# EAGLE board ospi_v11 (EAGLE 6.4)
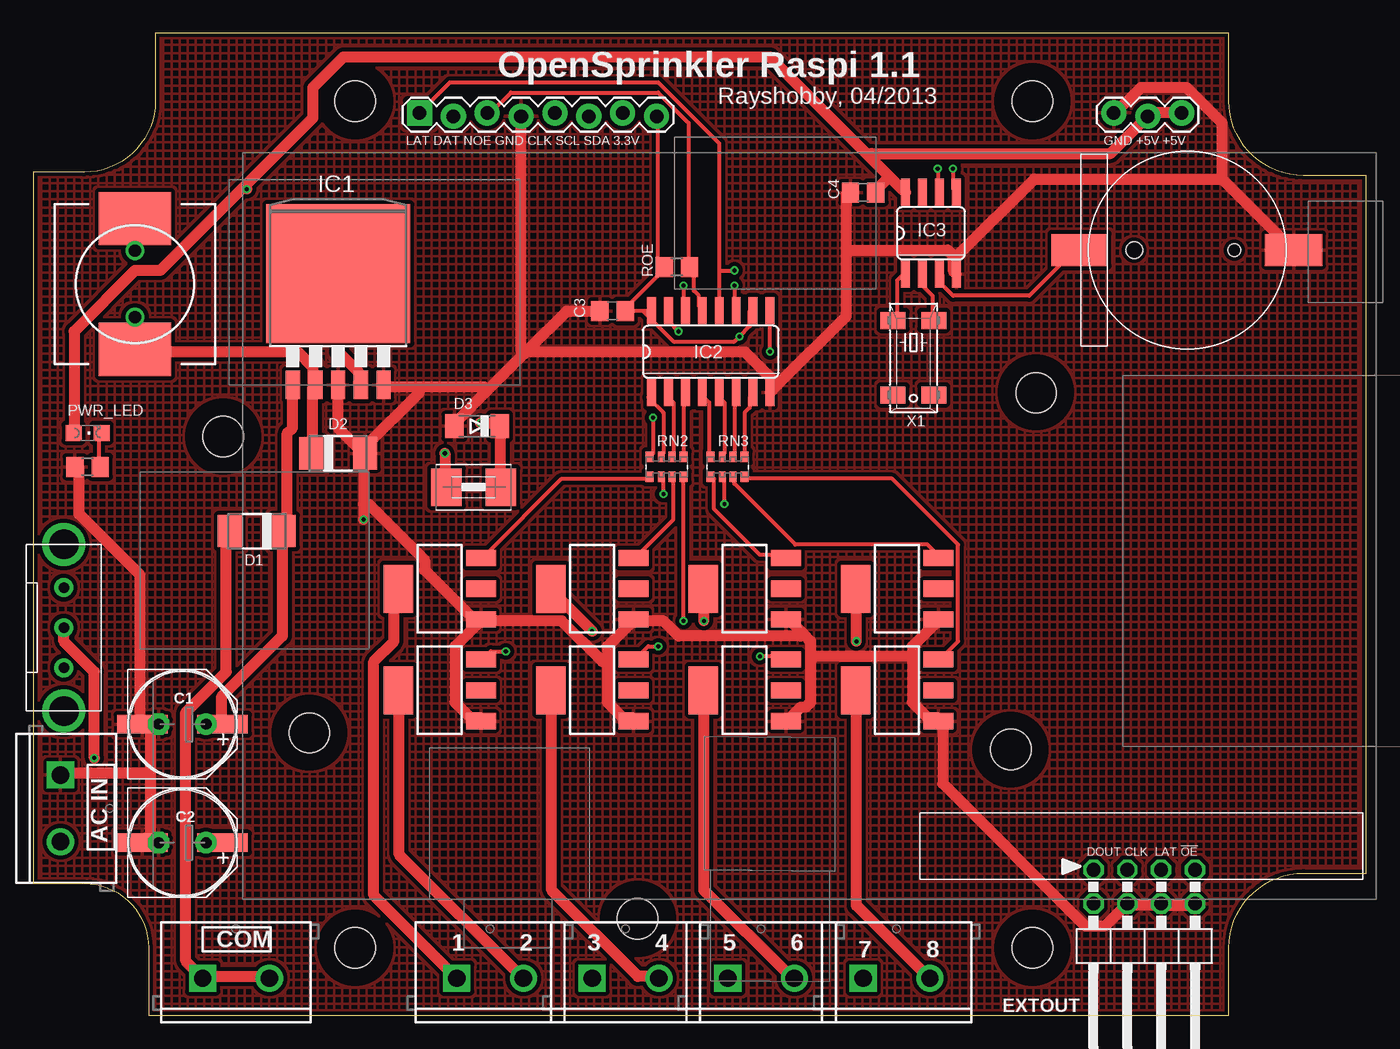
[diagram p0: board, top side]
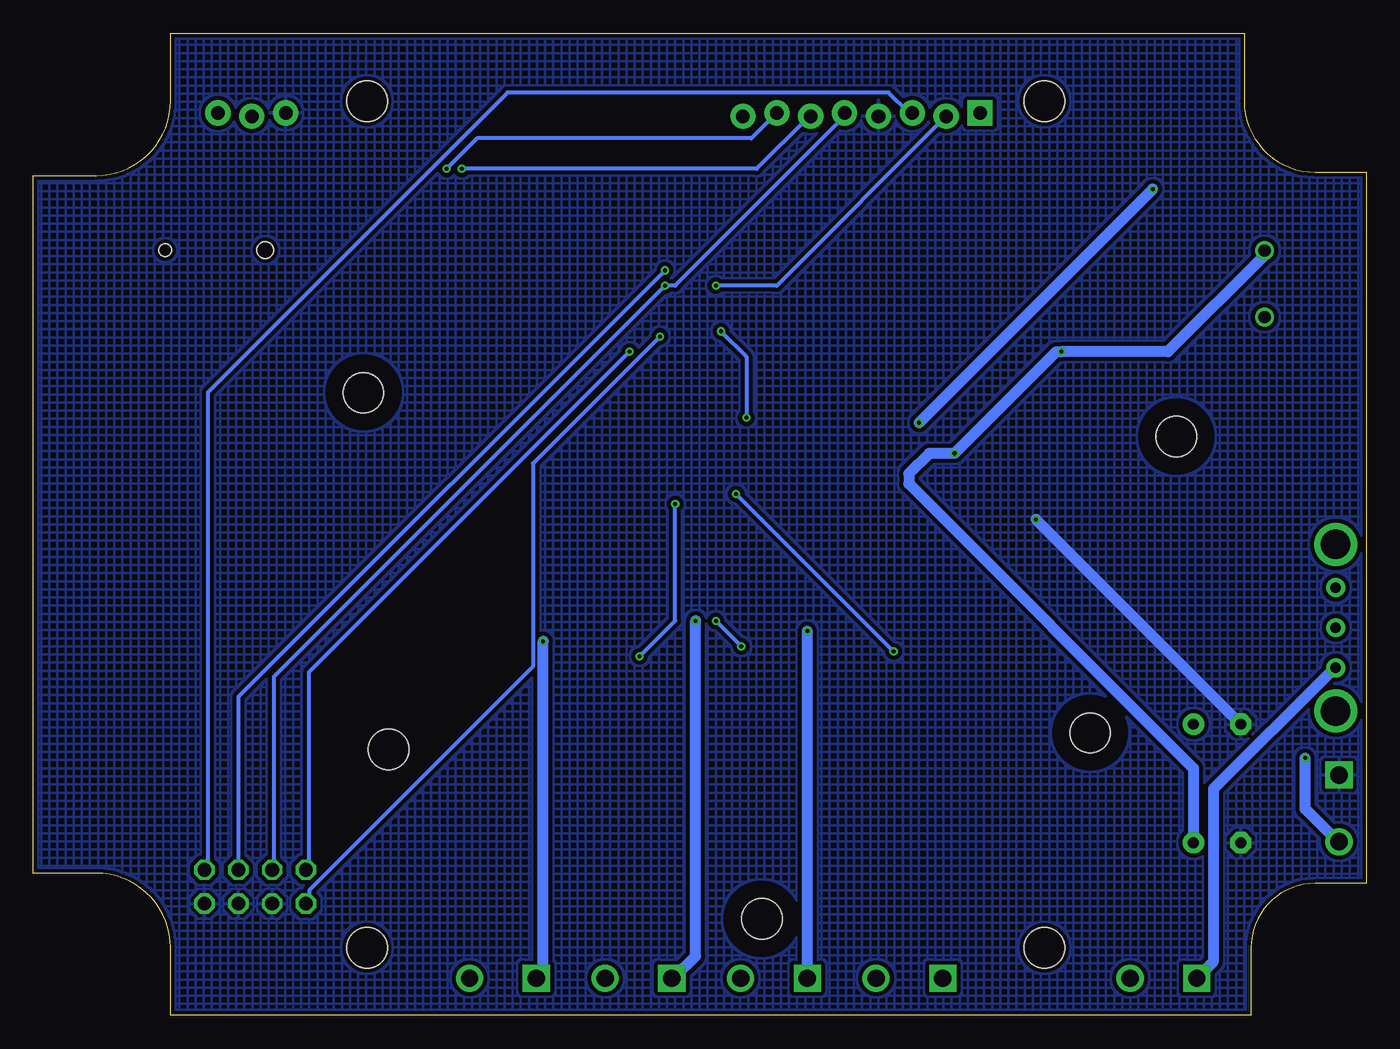
[diagram p1: board, bottom side, seen from below]

Size 99.95 x 73.66 mm. Coordinates in mm from the lower left corner, seen from the top.
Outline: 8.64,0 89.66,0 89.66,5.08 arc-90 95.25,10.67 99.95,10.67 99.95,62.99 95.25,62.99 arc-90 89.66,68.58 89.66,73.66 9.14,73.66 9.14,68.58 arc-90 3.81,63.25 0,63.25 0,9.91 3.81,9.91 arc-90 8.64,5.08 8.64,0
Copper layers (1*16): Top 0.035mm / dielectric 1.5mm / Bottom 0.035mm
Design rules "Fusion_eagle_rule_v1.1": minimum track width 6mil, minimum drill 12mil, track to track 6mil, track to pad 6mil, pad to pad 6mil, via to via 6mil, smd to smd 0mil, copper to edge 10mil, drill to drill 10mil, minimum pad ring 10mil, minimum via ring 6mil, stop-mask expansion 2mil, vias tented up to drill 100mil, thermal gap 10mil
Net classes: 0 default: width 0.305 mm, clearance 0.203 mm; 1 power: width 0.813 mm, clearance 0.203 mm
Holes 3.05 mm at 24.13,5.08 74.93,5.08 24.13,68.58 74.93,68.58
tRestrict: area 21.6,2.5 to 26.7,7.6; area 72.4,2.5 to 77.5,7.6; area 21.6,66 to 26.7,71.1; area 72.4,66 to 77.5,71.1; area 18.2,18.7 to 23.2,23.7; area 42.8,4.7 to 47.9,9.8; area 70.7,17.4 to 75.8,22.5; area 72.6,44.2 to 77.7,49.3; area 11.7,40.9 to 16.8,46
bRestrict: area 11.7,40.9 to 16.8,46; area 72.6,44.2 to 77.7,49.3; area 70.7,17.4 to 75.8,22.5; area 42.8,4.7 to 47.9,9.8; area 18.2,18.7 to 23.2,23.7
vRestrict: area 4.1,12.7 to 6.1,18.5; area 12.7,4.8 to 17.8,6.6; area 72.6,0.3 to 78.2,1.3

## Footprints (pad centres in the part's own frame; a part is rotated, then mirrored left to right if it is on the bottom)
BATTCON_12MM_SMT = smd 2.4 x 4.3: P$1 0,11.96 | smd 2.4 x 4.2: P$2 0,-4.1 | hole 0.95: 0,7.5 | hole 1.25: 0,0
E3,5-8 = drill 0.813 pad 1.6: + -1.778,0 | drill 0.813 pad 1.6 octagon: - 1.778,0
PANASONIC_E = smd 3.8 x 1.4: + 3,0; - -3,0
C0805 = smd 1.3 x 1.5: 1 -0.95,0; 2 0.95,0
SCREWTERMINAL-5MM-2 = drill 1.3 pad 2.032 square: 1 0,0 | drill 1.3 pad 2.032: 2 5,0
DO-214AC = smd 1.8 x 2.4: A 2.025,0; C -2.025,0
MINIMELF = smd 1.4 x 1.8: A 1.7,0; C -1.7,0
2X04/90 = drill 1.016 octagon: 1 -3.81,-6.35; 2 -3.81,-3.81; 3 -1.27,-6.35; 4 -1.27,-3.81; 5 1.27,-6.35; 6 1.27,-3.81; 7 3.81,-6.35; 8 3.81,-3.81
1812 = smd 2.286 x 2.794: 1 -2.046,0; 2 2.046,0
TO263-5 = smd 1.067 x 2.159: 1 -3.404,-5.791; 2 -1.702,-5.791; 3 0,-5.791; 4 1.702,-5.791; 5 3.404,-5.791 | smd 10.8 x 10.41: 6 0,2.54
SO16 = smd 0.66 x 2.032: 1 -4.445,-3.073; 2 -3.175,-3.073; 3 -1.905,-3.073; 4 -0.635,-3.073; 5 0.635,-3.073; 6 1.905,-3.073; 7 3.175,-3.073; 8 4.445,-3.073; 9 4.445,3.073; 10 3.175,3.073; 11 1.905,3.073; 12 0.635,3.073; 13 -0.635,3.073; 14 -1.905,3.073; 15 -3.175,3.073; 16 -4.445,3.073
SO08 = smd 0.66 x 2.032: 1 -1.905,-3.073; 2 -0.635,-3.073; 3 0.635,-3.073; 4 1.905,-3.073; 5 1.905,3.073; 6 0.635,3.073; 7 -0.635,3.073; 8 -1.905,3.073
EG1206 = drill 0.8 pad 1.422: 1 -3,0; 2 0,0; 3 3,0 | drill 2.2: MT1 -6.25,0; MT2 6.25,0
1X08_LOCK = drill 1.016 pad 1.88 square: 1 0,0.127 | drill 1.016 pad 1.88: 2 2.54,-0.127; 3 5.08,0.127; 4 7.62,-0.127; 5 10.16,0.127; 6 12.7,-0.127; 7 15.24,0.127; 8 17.78,-0.127
1X03_LOCK = drill 1.016 pad 1.88: 1 0,0.127; 2 2.54,-0.127; 3 5.08,0.127
CDRH125 = smd 5.4 x 4: 1 0,4.9; 2 0,-4.9
6000-XXXX-RC = drill 0.9 pad 1.422: 1 -2.5,0; 2 2.5,0
CHIPLED_0805 = smd 1.2 x 1.2: A 0,-1.05; C 0,1.05
R0805 = smd 1.3 x 1.5: 1 -0.95,0; 2 0.95,0
EXB38V = smd 0.6 x 0.8: 1 -1.275,-0.75; 4 1.275,-0.75; 5 1.275,0.75; 8 -1.275,0.75 | smd 0.5 x 0.8: 2 -0.4,-0.75; 3 0.4,-0.75; 6 0.4,0.75; 7 -0.4,0.75
SOT223 = smd 1.219 x 2.235: 1 -2.311,-3.099; 2 0,-3.099; 3 2.311,-3.099 | smd 3.6 x 2.2: 4 0,3.099
OSPI = hole 3.048: 25,-6; 53,6.735; 84.06,-29.465 | hole 3: 77.6,-7.225; 23.1,-32.725
MM20SS = smd 1.27 x 1.88: 1 -2.794,-1.524; 2 2.794,-1.524; 3 2.794,1.524; 4 -2.794,1.524

## Placement (x,y rotation side)
BAT1  [BATTCON_12MM_SMT]  82.55,57.4 270 top
C1  100u/50V  [E3,5-8]  11.18,21.84 180 top
C1'  100u  [PANASONIC_E]  11.18,21.84 0 top
C2  100u  [E3,5-8]  11.18,12.95 180 top
C2'  100u  [PANASONIC_E]  11.18,12.95 0 top
C3  0.1u  [C0805]  43.43,52.83 180 top
C4  0.1u  [C0805]  62.23,61.72 180 top
COM  [SCREWTERMINAL-5MM-2]  12.7,2.79 0 top
D1  S1B  [DO-214AC]  16.76,36.32 180 top
D2  SS14  [DO-214AC]  22.86,42.16 0 top
D3  5.6V  [MINIMELF]  33.27,44.2 180 top
EXTOUT1  [2X04/90]  83.31,4.57 180 top
F2  [1812]  33.02,39.62 0 top
IC1  LM2596S  [TO263-5]  22.86,53.09 0 top
IC2  74HC595N  [SO16]  50.8,49.78 0 top
IC3  DS1307  [SO08]  67.31,58.67 0 top
J0  24VAC IN  [SCREWTERMINAL-5MM-2]  2.03,18.03 270 top
J2  EG1206  [EG1206]  2.29,29.08 270 top
JP1  [1X08_LOCK]  28.96,67.56 0 top
JP2  [1X03_LOCK]  81.03,67.56 0 top
L1  150uH  [CDRH125]  7.62,54.86 180 top
L1'  100uH  [6000-XXXX-RC]  7.62,54.86 90 top
PWR_LED  [CHIPLED_0805]  4.06,43.69 270 top
RLED  1K  [R0805]  4.06,41.15 180 top
RN2  [EXB38V]  47.5,41.15 0 top
RN3  [EXB38V]  52.07,41.15 0 top
ROE  10K  [R0805]  48.26,56.13 180 top
S12  [SCREWTERMINAL-5MM-2]  31.75,2.79 0 top
S34  [SCREWTERMINAL-5MM-2]  41.91,2.79 0 top
S56  [SCREWTERMINAL-5MM-2]  52.07,2.79 0 top
S78  [SCREWTERMINAL-5MM-2]  62.23,2.79 0 top
T1  BT1308W  [SOT223]  30.48,32 90 top
T2  BT1308W  [SOT223]  30.48,24.38 90 top
T3  BT1308W  [SOT223]  41.91,32 90 top
T4  BT1308W  [SOT223]  41.91,24.38 90 top
T5  BT1308W  [SOT223]  53.34,32 90 top
T6  BT1308W  [SOT223]  53.34,24.38 90 top
T7  BT1308W  [SOT223]  64.77,32 90 top
T8  BT1308W  [SOT223]  64.77,24.38 90 top
U$2  OSPI  [OSPI]  98.3,13.97 180 top
X1  32.657k  [MM20SS]  66,49.33 270 top

## Library data of the parts
BAT1 JP1 L1 = SparkFunNew
C1 C1' C2 C2' = resistor
C3 C4 L1' RLED ROE = rcl
COM IC2 J0 JP2 S12 S34 S56 S78 T1-T8 = SparkFun
D1-D3 = diode
EXTOUT1 = pinhead
F2 IC3 J2 PWR_LED = adafruit
IC1 = national-semiconductor; MF: NATIONAL SEMICONDUCTOR; MPN: LM2596S-ADJ/NOPB; OC_FARNELL: 9494367; OC_NEWARK: 41K3842
RN2 RN3 = resistor-dil; OC_FARNELL: unknown; OC_NEWARK: unknown
U$2 = RaspberryPi
X1 = crystal; OC_FARNELL: unknown; OC_NEWARK: unknown

## Nets
24VAC [power]: COM.1 COM.2 D1.A J2.3
A1: EXTOUT1.1 IC2.13 JP1.3 ROE.1
D5: IC2.14 JP1.2
D6: EXTOUT1.5 IC2.11 JP1.5
D7: EXTOUT1.3 IC2.12 JP1.1
GND [power]: BAT1.P$1 C1'.- C1.- C2'.- C2.- C3.2 C4.2 D2.A D3.A EXTOUT1.2 EXTOUT1.4 EXTOUT1.6 IC1.3 IC1.5 IC2.8 IC3.4 J0.1 JP1.4 JP2.1 RLED.2 T1.1 T2.1 T3.1 T4.1 T5.1 T6.1 T7.1 T8.1
N$1: PWR_LED.C RLED.1
N$2 [power]: C1'.+ C1.+ D1.C IC1.1
N$3: RN2.1 T1.3
N$4: IC2.5 RN3.7
N$5: IC2.6 RN3.6
N$6 [power]: J0.2 J2.2
N$7: IC2.7 RN3.5
N$8 [power]: D2.C IC1.2 L1'.1 L1.1
N$9: IC3.1 X1.1
N$10: IC2.4 RN3.8
N$11: IC2.3 RN2.5
N$12: IC2.2 RN2.6
N$13: IC2.1 RN2.7
N$14: IC2.15 RN2.8
N$15: RN2.2 T2.3
N$16 [power]: S12.1 T1.4
N$17 [power]: S12.2 T2.4
N$18 [power]: S34.1 T3.4
N$19: RN2.3 T3.3
N$20 [power]: S34.2 T4.4
N$21: RN2.4 T4.3
N$22 [power]: S56.1 T5.4
N$23 [power]: S56.2 T6.4
N$24 [power]: S78.1 T7.4
N$25 [power]: S78.2 T8.4
N$26: RN3.1 T5.3
N$27: RN3.2 T6.3
N$28: RN3.3 T7.3
N$29: RN3.4 T8.3
N$30: IC3.2 X1.4
N$36: BAT1.P$2 IC3.3
QH*: EXTOUT1.7 IC2.9
SCL: IC3.6 JP1.6
SDA: IC3.5 JP1.7
VCC: C3.1 EXTOUT1.8 IC2.10 IC2.16 JP1.8 ROE.2
VIN [power]: C4.1 D3.C F2.2 IC3.8 JP2.2 JP2.3 PWR_LED.A
VIN_PRE [power]: C2'.+ C2.+ F2.1 IC1.4 L1'.2 L1.2

## Tracks (layer width: path | path; a pad name or v marks a point on that pad's centre or on a via)
24VAC
  Top 0.813: D1.A 14.48,36.07 14.48,25.78 11.43,22.73 11.43,4.06 COM.1 12.95,2.92 17.53,2.92 COM.2
  Bottom 0.813: COM.1 11.43,4.06 11.43,17.02 2.67,25.78 2.29,25.78 J2.3
A1
  Top 0.305: IC2.13 49.91,53.21 49.91,53.97 49.53,54.36 49.53,55.88 ROE.1 49.15,56.26 49.15,66.93 46.86,69.22 35.81,69.22 34.29,67.69 JP1.3
  Bottom 0.305: EXTOUT1.1 86.87,10.92 86.87,46.74 64.39,69.22 35.81,69.22 34.29,67.69 JP1.3
D5  (via drill 0.3)
  Top 0.305: v48.77,54.74 48.77,53.21 IC2.14
  Bottom 0.305: v48.77,54.74 44.2,54.74 JP1.2
D6  (via drill 0.3)
  Top 0.305: v52.58,54.74 52.58,53.21 IC2.11
  Bottom 0.305: JP1.5 38.86,67.69 51.82,54.74 v52.58,54.74 81.92,25.4 81.92,10.92 EXTOUT1.5
D7  (via drill 0.3)
  Top 0.305: 51.44,55.88 51.44,65.41 46.86,69.98 31.24,69.98 JP1.1 | 51.44,55.88 IC2.12 | 51.44,55.88 v52.58,55.88
  Bottom 0.305: EXTOUT1.3 84.58,23.88 v52.58,55.88
GND  (via drill 0.3)
  Top 0.813: T2.1 33.53,22.35 32.77,22.35 31.62,23.5 31.62,27.69 33.53,29.59 T1.1 | 43.05,26.54 43.05,27.69 44.96,29.59 T3.1 45.34,29.59 47.24,29.59 48.39,28.45 57.53,28.45 57.72,28.64 | 43.05,26.54 43.05,23.5 44.2,22.35 44.96,22.35 T4.1 | T1.1 33.91,29.59 39.62,29.59 42.67,26.54 43.05,26.54 | 58.29,26.92 58.29,28.07 57.72,28.64 | 58.29,26.92 58.29,23.5 57.91,23.11 57.53,23.11 56.77,22.35 T6.1 | 57.72,28.64 56.77,29.59 T5.1 | EXTOUT1.2 86.87,8.25 84.96,8.25 EXTOUT1.4 84.58,8.25 82.3,8.25 EXTOUT1.6 80.39,6.73 78.87,6.73 68.2,17.4 68.2,21.97 T8.1 67.82,22.35 67.06,22.35 65.91,23.5 65.91,26.92 | 65.91,26.92 65.91,27.69 67.82,29.59 T7.1 | 65.91,26.92 58.29,26.92 | C2.- 9.14,13.21 8.38,13.21 C2'.- 8.76,13.59 8.76,18.16 | RLED.2 3.43,41.02 3.43,37.59 8,33.02 8,21.97 C1'.- 8.38,21.97 9.14,21.97 C1.- 8.76,21.59 8.76,18.16 | 8.76,18.16 2.29,18.16 J0.1 | 89.15,62.74 89.15,66.93 86.49,69.6 83.06,69.6 81.15,67.69 JP2.1 | 89.15,62.74 94.49,57.4 BAT1.P$1 | 60.96,57.4 60.96,52.45 55.82,47.31 | 60.96,57.4 60.96,61.59 C4.2 | 55.82,47.31 55.24,46.74 IC2.8 | 68.96,57.02 68.96,55.88 IC3.4 | 68.96,57.02 68.58,57.4 60.96,57.4 | IC1.3 22.86,44.07 24.77,42.16 D2.A | C3.2 40.01,52.83 37.15,49.97 | 34.1,46.93 31.62,44.45 D3.A | 34.1,46.93 36.77,49.59 | 36.77,49.59 37.15,49.97 | 28.96,47.12 33.91,47.12 34.1,46.93 | 28.96,47.12 26.29,47.12 IC1.5 | JP1.4 36.58,49.78 36.77,49.59 | D2.A 24.77,42.54 28.96,46.74 28.96,47.12 | 55.82,47.31 53.34,49.78 37.34,49.78 37.15,49.97 | 89.15,62.74 75.06,62.74 69.34,57.02 68.96,57.02 | 24.77,38.35 24.77,41.78 D2.A | 24.77,38.35 v24.77,37.21 | T1.1 33.15,29.59 29.34,33.4 29.34,34.16 25.15,38.35 24.77,38.35
  Bottom 0.813: v24.77,37.21 C1.-
  pour Top (isolate 0.305, hatched): 0,73.91 101.6,73.91 101.6,0.25 0,0.25
  pour Bottom (isolate 0.305, hatched): 0,73.91 101.6,73.91 101.6,0.25 0,0.25
N$1
  Top 0.305: PWR_LED.C 4.95,43.69 4.95,41.4 RLED.1
N$2
  Top 0.813: C1.+ 12.95,21.97 14.1,21.97 C1'.+ 14.1,22.35 14.1,23.88 18.67,28.45 18.67,36.07 D1.C 19.05,36.45 19.05,43.69 19.43,44.07 19.43,47.12 IC1.1
N$3
  Top 0.305: RN2.1 46.1,40.26 39.62,40.26 33.91,34.54 T1.3
N$4
  Top 0.305: RN3.7 51.82,42.16 51.82,45.97 51.44,46.35 IC2.5
N$5
  Top 0.305: RN3.6 52.58,42.16 52.58,46.35 IC2.6
N$6  (via drill 0.3)
  Top 0.813: J2.2 2.29,28.07 4.57,25.78 v4.57,19.3
  Bottom 0.813: v4.57,19.3 4.57,15.49 2.29,13.21 J0.2
N$7
  Top 0.305: RN3.5 53.34,42.16 53.34,45.21 53.72,45.59 53.72,46.35 IC2.7
N$8
  Top 0.813: D2.C 20.95,42.16 20.95,47.12 IC1.2 20.95,47.5 20.95,48.64 19.81,49.78 8,49.78 L1.1 L1'.1
N$9
  Top 0.305: X1.1 64.77,52.45 64.77,55.12 65.15,55.5 IC3.1
N$10
  Top 0.305: RN3.8 50.67,42.16 50.67,45.97 50.29,46.35 IC2.4
N$11
  Top 0.305: RN2.5 48.77,42.16 48.77,46.35 IC2.3
N$12
  Top 0.305: RN2.6 48.01,42.16 48.01,45.97 47.62,46.35 IC2.2
N$13
  Top 0.305: RN2.7 47.24,42.16 47.24,45.21 46.1,46.35 IC2.1
N$14  (via drill 0.3)
  Top 0.305: v46.48,44.83 46.48,42.16 RN2.8 | v48.39,51.31 47.62,52.07 IC2.15
  Bottom 0.305: v46.48,44.83 46.48,49.4 v48.39,51.31
N$15  (via drill 0.3)
  Top 0.305: v47.24,39.12 47.24,40.26 RN2.2 | v35.43,27.3 34.29,27.3 33.91,26.92 T2.3
  Bottom 0.305: v35.43,27.3 v47.24,39.12
N$16
  Top 0.813: S12.1 25.53,9.02 25.53,26.54 27.05,28.07 27.05,31.88 T1.4
N$17
  Top 0.813: T2.4 27.43,24.26 27.43,12.06 36.58,2.92 S12.2
N$18  (via drill 0.3)
  Top 0.813: v41.91,28.83 38.86,31.88 T3.4
  Bottom 0.813: S34.1 v41.91,28.83
N$19
  Top 0.305: RN2.3 48.01,40.26 48.01,37.21 45.34,34.54 T3.3
N$20
  Top 0.813: T4.4 38.86,24.26 38.86,9.4 45.34,2.92 46.86,2.92 S34.2
N$21  (via drill 0.3)
  Top 0.305: v48.77,29.59 48.77,40.26 RN2.4 | v46.86,27.69 46.1,27.69 45.34,26.92 T4.3
  Bottom 0.305: v46.86,27.69 v48.77,29.59
N$22  (via drill 0.3)
  Top 0.813: v50.29,29.59 50.29,31.88 T5.4
  Bottom 0.813: v50.29,29.59 50.29,4.45 51.82,2.92 S56.1
N$23
  Top 0.813: T6.4 50.29,24.26 50.29,9.4 56.77,2.92 S56.2
N$24  (via drill 0.3)
  Top 0.813: v61.72,28.07 61.72,31.88 T7.4
  Bottom 0.813: v61.72,28.07 61.72,3.3 S78.1
N$25
  Top 0.813: T8.4 61.72,24.26 61.72,8.25 67.06,2.92 S78.2
N$26
  Top 0.305: RN3.1 51.05,40.26 51.05,37.97 54.48,34.54 56.39,34.54 T5.3
N$27  (via drill 0.3)
  Top 0.305: v51.82,38.35 51.82,40.26 RN3.2 | v54.48,26.92 56.39,26.92 T6.3
  Bottom 0.305: v51.82,38.35 51.82,29.59 v54.48,26.92
N$28
  Top 0.305: RN3.3 52.58,40.26 52.58,39.88 57.15,35.31 67.06,35.31 67.82,34.54 T7.3
N$29
  Top 0.305: RN3.4 53.34,40.26 64.39,40.26 69.34,35.31 69.34,28.07 68.2,26.92 T8.3
N$30
  Top 0.305: IC3.2 66.67,54.74 67.44,53.97 67.44,52.45 X1.4
N$36
  Top 0.305: IC3.3 68.2,55.5 68.2,54.74 68.96,53.97 74.68,53.97 78.11,57.4 BAT1.P$2
QH*  (via drill 0.3)
  Top 0.305: v55.24,49.78 IC2.9
  Bottom 0.305: v55.24,49.78 79.25,25.78 79.25,10.92 EXTOUT1.7
SCL  (via drill 0.3)
  Top 0.305: v67.82,63.5 67.82,61.98 IC3.6
  Bottom 0.305: v67.82,63.5 45.72,63.5 41.91,67.31 JP1.6
SDA  (via drill 0.3)
  Top 0.305: v68.96,63.5 68.96,61.98 IC3.5
  Bottom 0.305: v68.96,63.5 66.67,65.79 46.1,65.79 JP1.7
VCC  (via drill 0.3)
  Top 0.305: 45.72,52.83 46.1,52.83 IC2.16 | 45.72,52.83 C3.1 44.2,52.83 46.86,55.5 | 46.86,55.5 47.24,55.88 ROE.2 46.86,55.5 | 45.72,52.83 48.01,50.55 52.58,50.55 v52.96,50.93 53.72,51.69 53.72,52.83 IC2.10 | 46.86,55.5 46.86,67.31 JP1.8
  Bottom 0.305: v52.96,50.93 62.48,41.4 62.48,26.16 79.25,9.4 79.25,8.64 EXTOUT1.8
VIN  (via drill 0.3)
  Top 0.813: JP2.3 83.82,67.69 JP2.2 80.77,64.64 62.87,64.64 62.67,64.45 | F2.2 35.05,39.88 35.05,44.07 D3.C 34.67,44.45 v33.53,44.45 | 15.81,62.17 20.95,67.31 20.95,69.6 23.24,71.88 55.24,71.88 62.67,64.45 | 15.81,62.17 9.53,55.88 7.62,55.88 3.05,51.31 3.05,43.69 PWR_LED.A | 64.2,62.93 65.15,61.98 IC3.8 | 64.2,62.93 62.67,64.45 | 64.2,62.93 63.25,61.98 C4.1 | v16,61.98 15.81,62.17
  Bottom 0.813: v16,61.98 v33.53,44.45
VIN_PRE  (via drill 0.3)
  Top 0.813: C2.+ 12.95,13.21 14.1,13.21 C2'.+ | v22.86,49.78 24.38,48.26 24.38,47.5 IC1.4 | v30.86,42.16 30.86,39.88 F2.1 | L1'.2 L1.2
  Bottom 0.813: L1'.2 7.62,57.02 14.86,49.78 v22.86,49.78 23.24,49.78 v30.86,42.16 32.77,42.16 34.29,40.64 34.29,39.88 12.95,18.54 C2.+

## Text on the board
tNames: OpenSprinkler Raspi 1.1 | Rayshobby, 04/2013 | LAT DAT NOE GND CLK SCL SDA 3.3V | GND +5V +5V | AC IN | DOUT CLK LAT !OE | 1 | 2 | 3 | 4 | 5 | 6 | 7 | 8 | EXTOUT
BoxDim: Serpac WM-032C Enclosure | All units are in inch | Left | Right | Front | Bottom